# Altium PCB seniordesign.PcbDoc
Units mil, origin at the board's own origin, x right, y up, seen from the top; angles counter-clockwise.
Board outline 1900 x 1745 mil, 2 copper layers (Top Layer, Bottom Layer); 10 components, 13 nets, 59 pads, 0 vias.
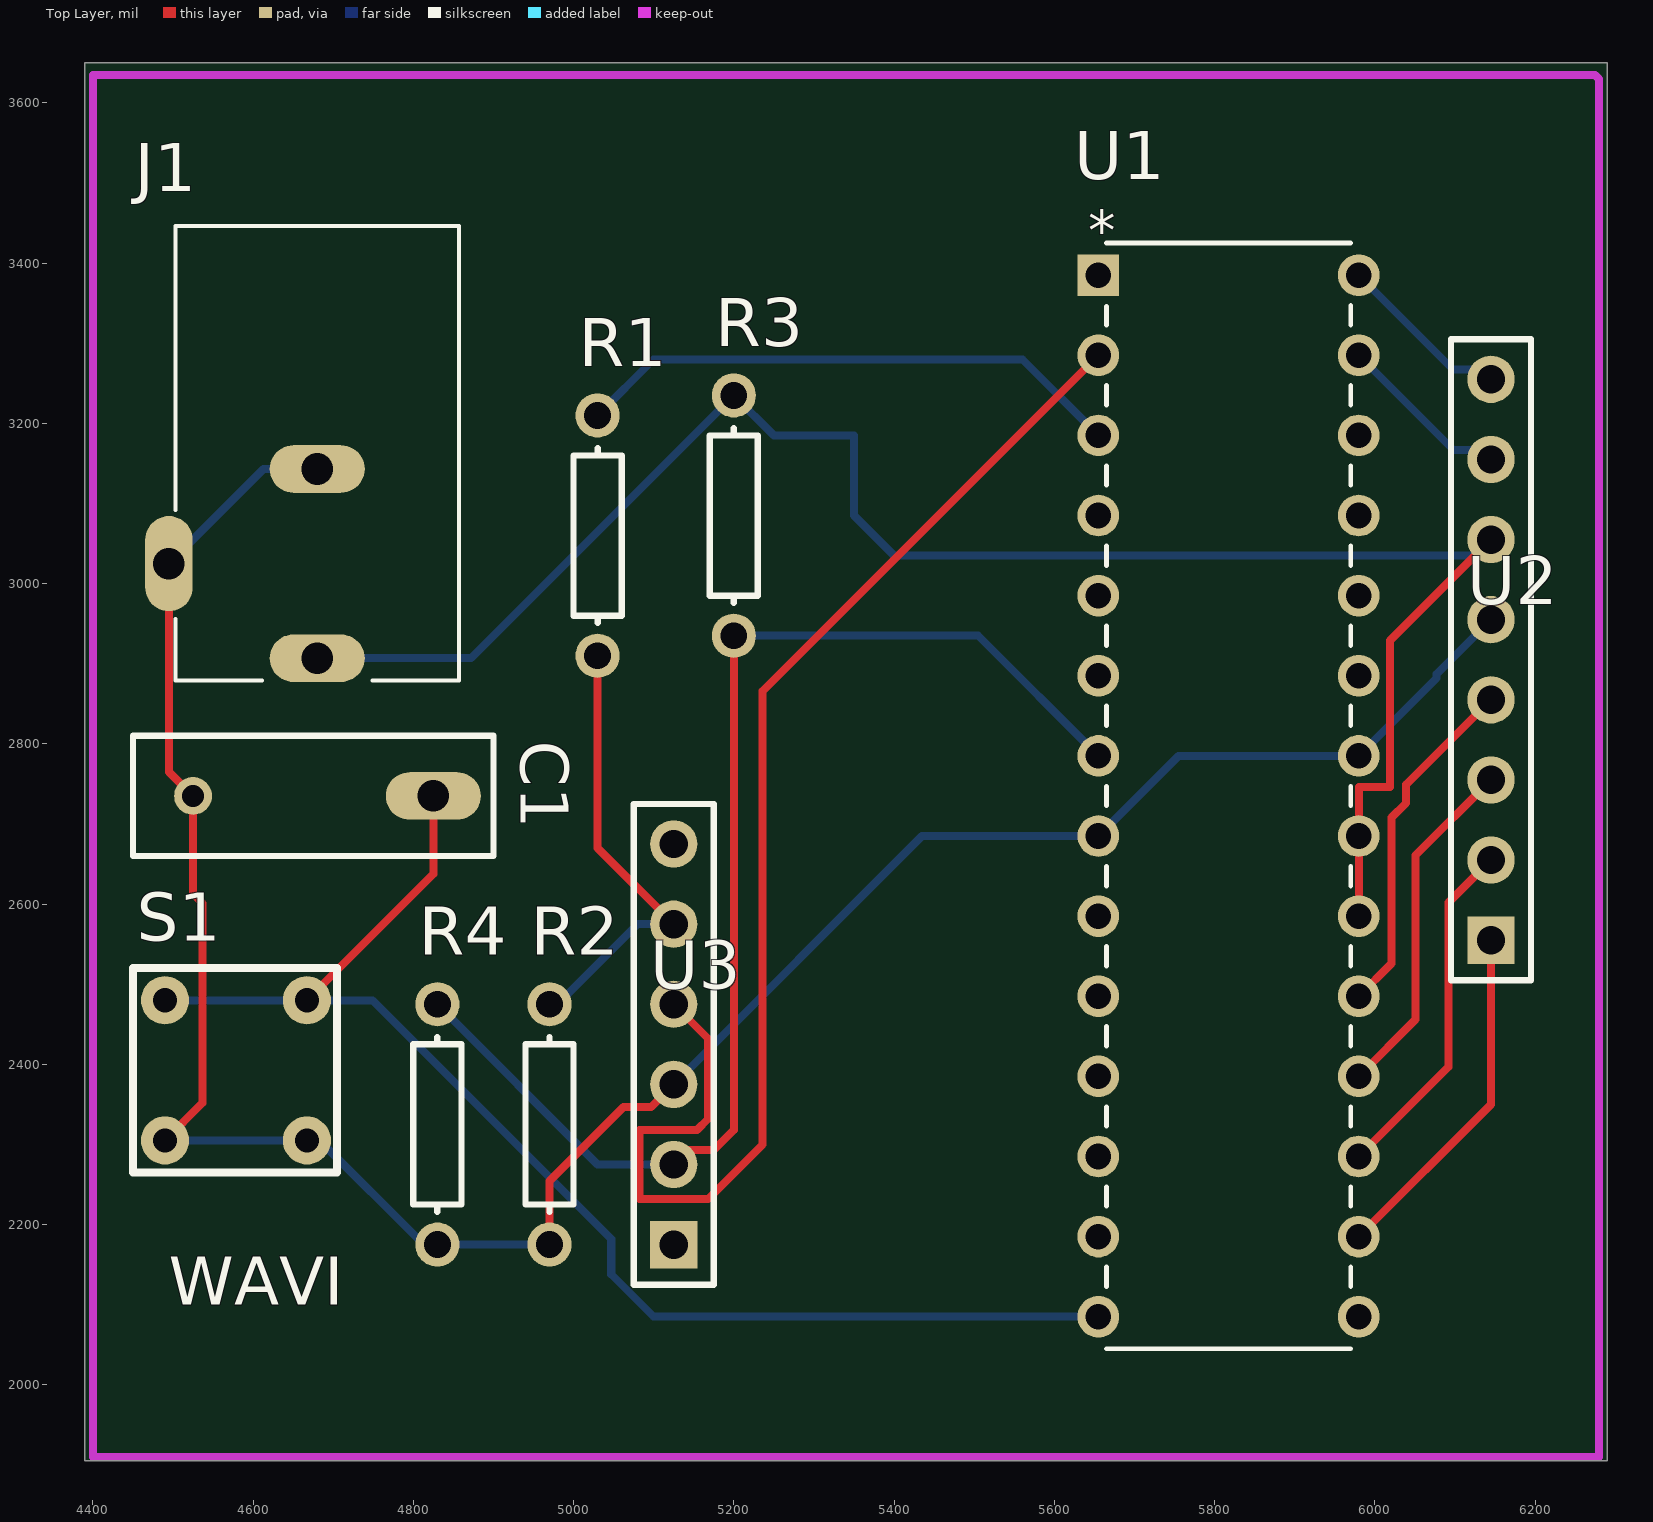
[diagram p0: Top Layer view]
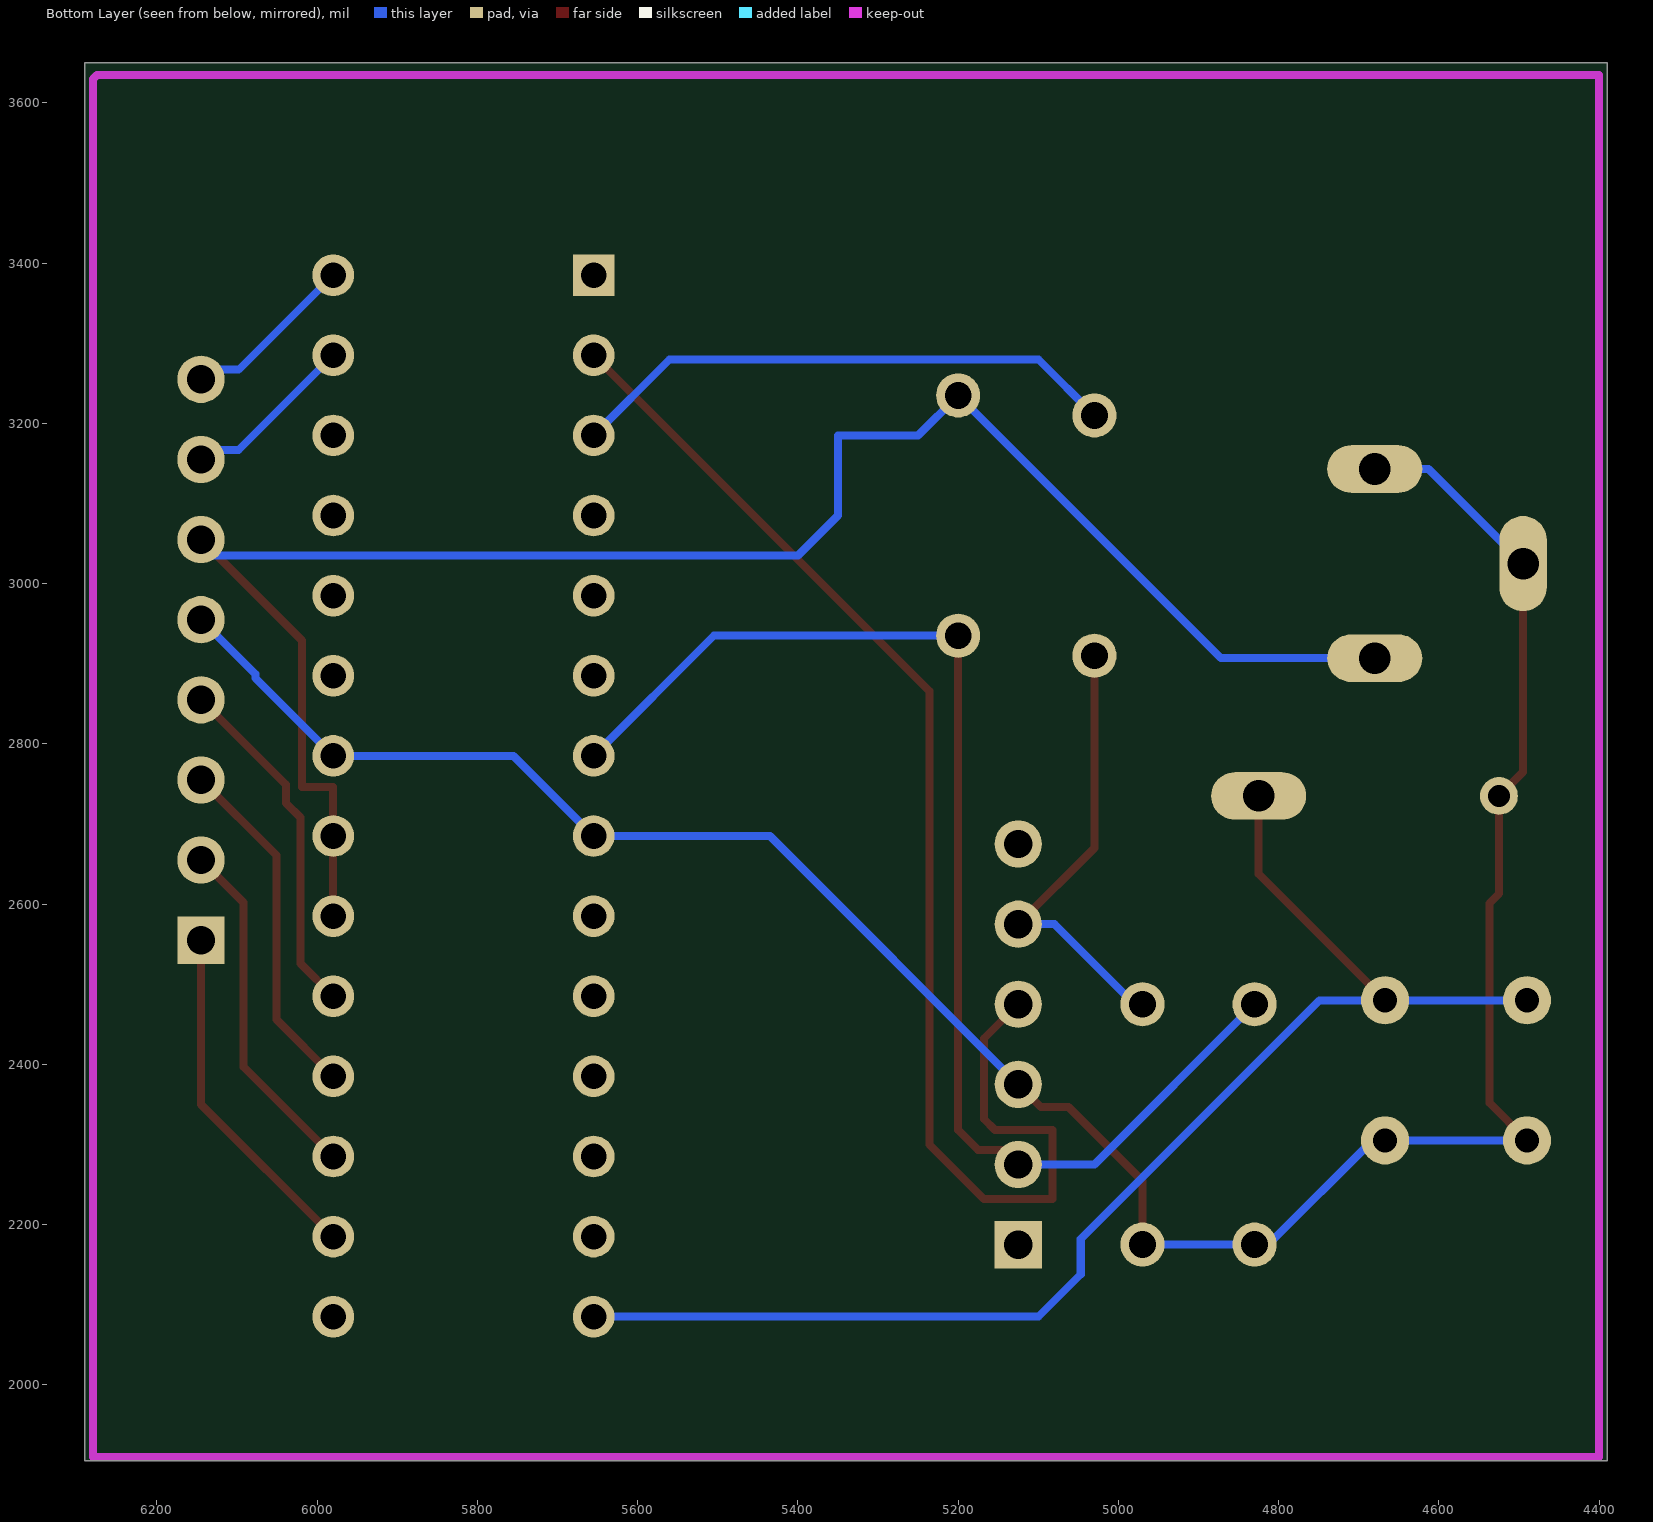
[diagram p1: Bottom Layer view, seen from below]

## Layer stack, top to bottom
Top Solder: solder mask 0.4, Solder Resist, Dk 3.5
Top Layer: signal copper 1.4
Dielectric 1: dielectric 12.6, FR-4, Dk 4.8
Bottom Layer: signal copper 1.4
Bottom Solder: solder mask 0.4, Solder Resist, Dk 3.5

## Board outline
4390,1905 6290,1905 6290,3650 4390,3650

## Design rules (kind name [scope] priority, off if disabled: settings)
BoardOutlineClearance "BoardOutlineClearance Outside Layers" [OnLayer('Top Layer') or OnLayer('Bottom Layer')] p1: gap=10 ignorepadtopadclearanceinfootprint=FALSE except(0: Arc-SplitContinuation Track-SplitContinuation SMDPad-SplitContinuation THPad-SplitContinuation Via-SplitContinuation Fill-SplitContinuation Poly-SplitContinuation Region-SplitContinuation Text-SplitContinuation)
Clearance "Clearance Via to Trace" [IsVia vs IsTrack] p1: gap=12 ignorepadtopadclearanceinfootprint=FALSE
Clearance "Clearance Pad to Trace" [IsPad vs IsTrack] p2: gap=8 ignorepadtopadclearanceinfootprint=FALSE
Clearance "Clearance Different Net Vias" [IsVia vs IsVia] p3: gap=17 ignorepadtopadclearanceinfootprint=FALSE
Clearance "Clearance Same Net Vias" [IsVia vs IsVia] p4: gap=8 ignorepadtopadclearanceinfootprint=FALSE
Clearance "Clearance Same Net" [All] p5: gap=10 ignorepadtopadclearanceinfootprint=FALSE except(0: Arc-Hole Track-Hole SMDPad-Hole THPad-Hole Via-Hole Fill-Hole Poly-Hole Region-Hole Text-Hole; 8: Via-Via; 24.02: THPad-THPad)
Clearance "Clearance Different Net" [All] p6: gap=10 ignorepadtopadclearanceinfootprint=FALSE except(0: Arc-Hole Track-Hole SMDPad-Hole THPad-Hole Via-Hole Fill-Hole Poly-Hole Region-Hole Text-Hole; 17: Via-Via; 24.02: THPad-THPad)
HoleSize [All] p1: absolutevalues=TRUE maxlimit=255.91 minlimit=11.81 maxpercent=80.000 minpercent=20.000
PolygonConnect [All] p1: connectstyle=Relief reliefconductorwidth=10 reliefentries=4 polygonreliefangle="90 Angle" airgapwidth=10
RoomDefinition seniordesign [InComponentClass('seniordesign')] p1: confinementstyle=ConfineIn formatcopy=TRUE lockcomponents=FALSE outline 4390,1900 6280,1900 6280,3640 4390,3640
RoutingVias [All] p1: holewidth=28 width=50 viastyle="Through Hole" minholewidth=28 minwidth=50 maxholewidth=314.96 maxwidth=292.95
SilkToSilkClearance [All] p1: silktosilkclearance=8
SolderMaskExpansion [All] p1: expansion=4
UnRoutedNet [All] p1: checkbadconnections=TRUE
Width [All] p1: maxlimit=10 minlimit=6 preferedwidth=10
27 further rules are at their usual default settings.

## Components (designator, comment, footprint, x,y, rotation, side; value= is the part's Value field where it differs from the comment)
C1 "Cap" RAD-0.3 4675,2735 r0 top value=1uF
J1 "PJ-102A" *CUI_PJ-102A 4680,3025 r0 top
R1 "Res1" AXIAL-0.3 5030,3060 r90 top value=340
R2 "Res1" AXIAL-0.3 4970,2325 r90 top value=340
R3 "Res1" AXIAL-0.3 5200,3085 r90 top value=340
R4 "Res1" AXIAL-0.3 4830,2325 r90 top value=660
S1 "SW-PB" PCBComponent_1 4490,2480 r0 top
U1 "Part Number: ATMEGA328P-PN" 28P3 5980,2085 r0 top value=Value
U2 "Arducam" HDR1X8 6145,2555 r90 top
U3 "HC-05" HDR1X6 5125,2175 r90 top

## Footprints (in the part's own frame and the unit in brackets; to place one, negate y for a bottom-side part, rotate by r counter-clockwise, add the part's x,y. Pads: shape width x height; smd on the part's side, far side on the other; paste and mask are expansions set on the pad)
28P3 [mil]
  rect 52x52 hole 32 mask+0: 1(-325,1300)
  round 52 hole 32 mask+0: 2(-325,1200) 3(-325,1100) 4(-325,1000) 5(-325,900) 6(-325,800) 7(-325,700) 8(-325,600) 9(-325,500) 10(-325,400) 11(-325,300) 12(-325,200) 13(-325,100) 14(-325,0) 15(0,0) 16(0,100) 17(0,200) 18(0,300) 19(0,400) 20(0,500) 21(0,600) 22(0,700) 23(0,800) 24(0,900) 25(0,1000) 26(0,1100) 27(0,1200) 28(0,1300)
  silkscreen extent -315,-40 -10,1340, body extent 0,0 10,10, height 10
*CUI_PJ-102A [mm]
  oval 3.016x1.508 hole 1: 1(0,-3) 2(0,3)
  oval 1.508x3.016 hole 1: 3(-4.7,0)
  silkscreen extent -4.5,-3.7 4.5,10.7
AXIAL-0.3 [mm] "Axial Device, Thru-Hole; 2 Leads; 0.3 in Pin Spacing"
  round 1.4 hole 0.85: 1(-3.81,0) 2(3.81,0)
  silkscreen extent -2.77,-0.76 2.77,0.76
HDR1X6 [mm] "Connector; Header; 6 Position"
  rect 1.5x1.5 hole 0.9: 1(0,0)
  round 1.5 hole 0.9: 2(2.54,0) 3(5.08,0) 4(7.62,0) 5(10.16,0) 6(12.7,0)
  silkscreen extent -1.27,-1.27 13.97,1.27
HDR1X8 [mm] "Connector; Header; 8 Position"
  rect 1.5x1.5 hole 0.9: 1(0,0)
  round 1.5 hole 0.9: 2(2.54,0) 3(5.08,0) 4(7.62,0) 5(10.16,0) 6(12.7,0) 7(15.24,0) 8(17.78,0)
  silkscreen extent -1.27,-1.27 19.05,1.27
PCBComponent_1 [mil]
  round 60 hole 30: 1(0,0) 1(177.17,0) 2(0,-175) 2(177.17,-175)
  silkscreen extent -40,-215 215,40
RAD-0.3 [mm] "Radial Cap, Thru-Hole; 2 Leads; 0.3 in Pin Spacing"
  round 1.2 hole 0.7: 1(-3.81,0)
  oval 3.016x1.508 hole 1: 2(3.81,0)
  silkscreen extent -5.71,-1.91 5.71,1.91

## Part data
C1: "Capacitor", LatestRevisionDate=17-Jul-2002, LatestRevisionNote="Re-released for DXP Platform.", PackageDescription="Radial Cap, Thru-Hole; 2 Leads; 0.3 in Pin Spacing", PackageReference=RAD-0.3, Published=8-Jun-2000, Publisher="Altium Limited"
R1 R2 R3 R4: "Resistor", LatestRevisionDate=17-Jul-2002, LatestRevisionNote="Re-released for DXP Platform.", PackageDescription="Axial Device, Thru-Hole; 2 Leads; 0.3 in Pin Spacing", PackageReference=AXIAL-0.3, Published=8-Jun-2000, Publisher="Altium Limited"
S1: "Switch", LatestRevisionDate=17-Jul-2002, LatestRevisionNote="Re-released for DXP Platform.", PackageDescription="Switch; 2 Leads", PackageReference=SPST-2, Published=24-Mar-1999, Publisher="Altium Limited"
U1: library part ATMEGA328P-PN, "No Description Available", Built_By=EMA_UL_Team, Copyright="Copyright (C) 2018 Accelerated Designs. All rights reserved", Manufacturer_Part_Number=ATMEGA328P-PN, RefDes=RefDes, Type=DEV, Vendor=Atmel
U3: "Bluetooth module"

## Nets (pads, with @x,y where several pads share a name; then routed paths per layer and width w, separated by ;. In a path a pad name is that pad's centre, name@x,y a point inside that pad or via, vN(x,y) a via of type N, cw(c..) or ccw(c..) an arc to the next point about the centre after c; other vN are vias at no path point)
GND: C1.1 J1.2 J1.3 R2.1 R4.1 S1.2 U1.8 U1.22 U2.5 U3.3 | length 3086.4
  Top Layer w10: S1.2@4490,2305 4537,2352 4537,2601 4525,2613 C1.1 4494.96,2765.04 J1.3 ; R2.1@4970,2165 R2.1 4970,2254.38 5062.47,2346.85 5096.85,2346.85 U3.3
  Bottom Layer w10: S1.2@4490,2305 4667.17,2305 4683,2305 4813,2175 R4.1 4960,2175 R2.1@4970,2165 ; J1.3 4613.07,3143.11 J1.2 ; U3.3 5435,2685 U1.8 5755,2785 U1.22 6077,2882 6077,2887 U2.5
NetC1_2: C1.2 S1.1 U1.14 | length 1674.8
  Top Layer w10: S1.1@4667.17,2480 4825,2637.83 C1.2
  Bottom Layer w10: S1.1@4490,2480 4667.17,2480 4749,2480 5047,2182 5047,2138 5100,2085 U1.14
NetR1_1: R1.1 R2.2 U3.5 | length 574.9
  Top Layer w10: R1.1 5030,2670 U3.5
  Bottom Layer w10: R2.2@4970,2465 5080,2575 U3.5
NetR1_2: R1.2 U1.3 | length 693.3
  Bottom Layer w10: R1.2 5100,3280 5560,3280 U1.3
NetR3_1: R3.1 R4.2 U1.7 U3.2 | length 1604.8
  Top Layer w10: U3.2 5143,2293 5175,2293 5200,2318 R3.1
  Bottom Layer w10: R4.2 5030,2275 U3.2 ; R3.1 5505,2935 U1.7
NetU1_2: U1.2 U3.4 | length 1678.4
  Top Layer w10: U3.4 5168,2432 5168,2332 5154,2318 5082.47,2318 5082.47,2232 5168,2232 5236,2300 5236,2866 U1.2
NetU1_16: U1.16 U2.1 | length 438.3
  Top Layer w10: U1.16 6145,2350 U2.1
NetU1_17: U1.17 U2.2 | length 438.3
  Top Layer w10: U1.17 6092,2397 6092,2602 U2.2
NetU1_18: U1.18 U2.3 | length 438.3
  Top Layer w10: U1.18 6051,2456 6051,2661 U2.3
NetU1_19: U1.19 U2.4 | length 438.3
  Top Layer w10: U1.19 6021,2526 6021,2708 6039,2726 6039,2749 U2.4
NetU1_27: U1.27 U2.7 | length 225.9
  Bottom Layer w10: U1.27 6098,3167 6145,3167 U2.7
NetU1_28: U1.28 U2.8 | length 225.9
  Bottom Layer w10: U1.28 6098,3267 6145,3267 U2.8
VCC: J1.1 R3.2 U1.20 U1.21 U2.6 | length 2323.5
  Top Layer w10: U1.20 U1.21 5980,2746 6019,2746 6019,2929 U2.6
  Bottom Layer w10: J1.1 4871.89,2906.89 R3.2 5250,3185 5350,3185 5350,3085 5400,3035 6145,3035 U2.6
pads on no net: U1.1 U1.4 U1.5 U1.6 U1.9 U1.10 U1.11 U1.12 U1.13 U1.15 U1.23 U1.24 U1.25 U1.26 U3.1 U3.6

## Keep-outs
Keep-Out Layer:
  lines w10: 4400,1910 4400,3635 6005,3635 6185,3635 6275,3635 6280,3630 6280,1910 4400,1910

## Silkscreen, mask and mechanical layers (free items; w line width, h text height)
Top Overlay:
  text "WAVI" at 4495,2100 h60

## Text inside footprints (layer, text, board x,y; h text height)
U1: Top Overlay "*" at 5642.5,3416 h50; Mechanical 13 "*" at 5667.5,3360 h50